# Altium PCB PWM.PcbDoc
Units mil, origin at the board's own origin, x right, y up, seen from the top; angles counter-clockwise.
Board outline 1915.02 x 2010.03 mil, 2 copper layers (Top Layer, Bottom Layer); 17 components, 18 nets, 53 pads, 0 vias.
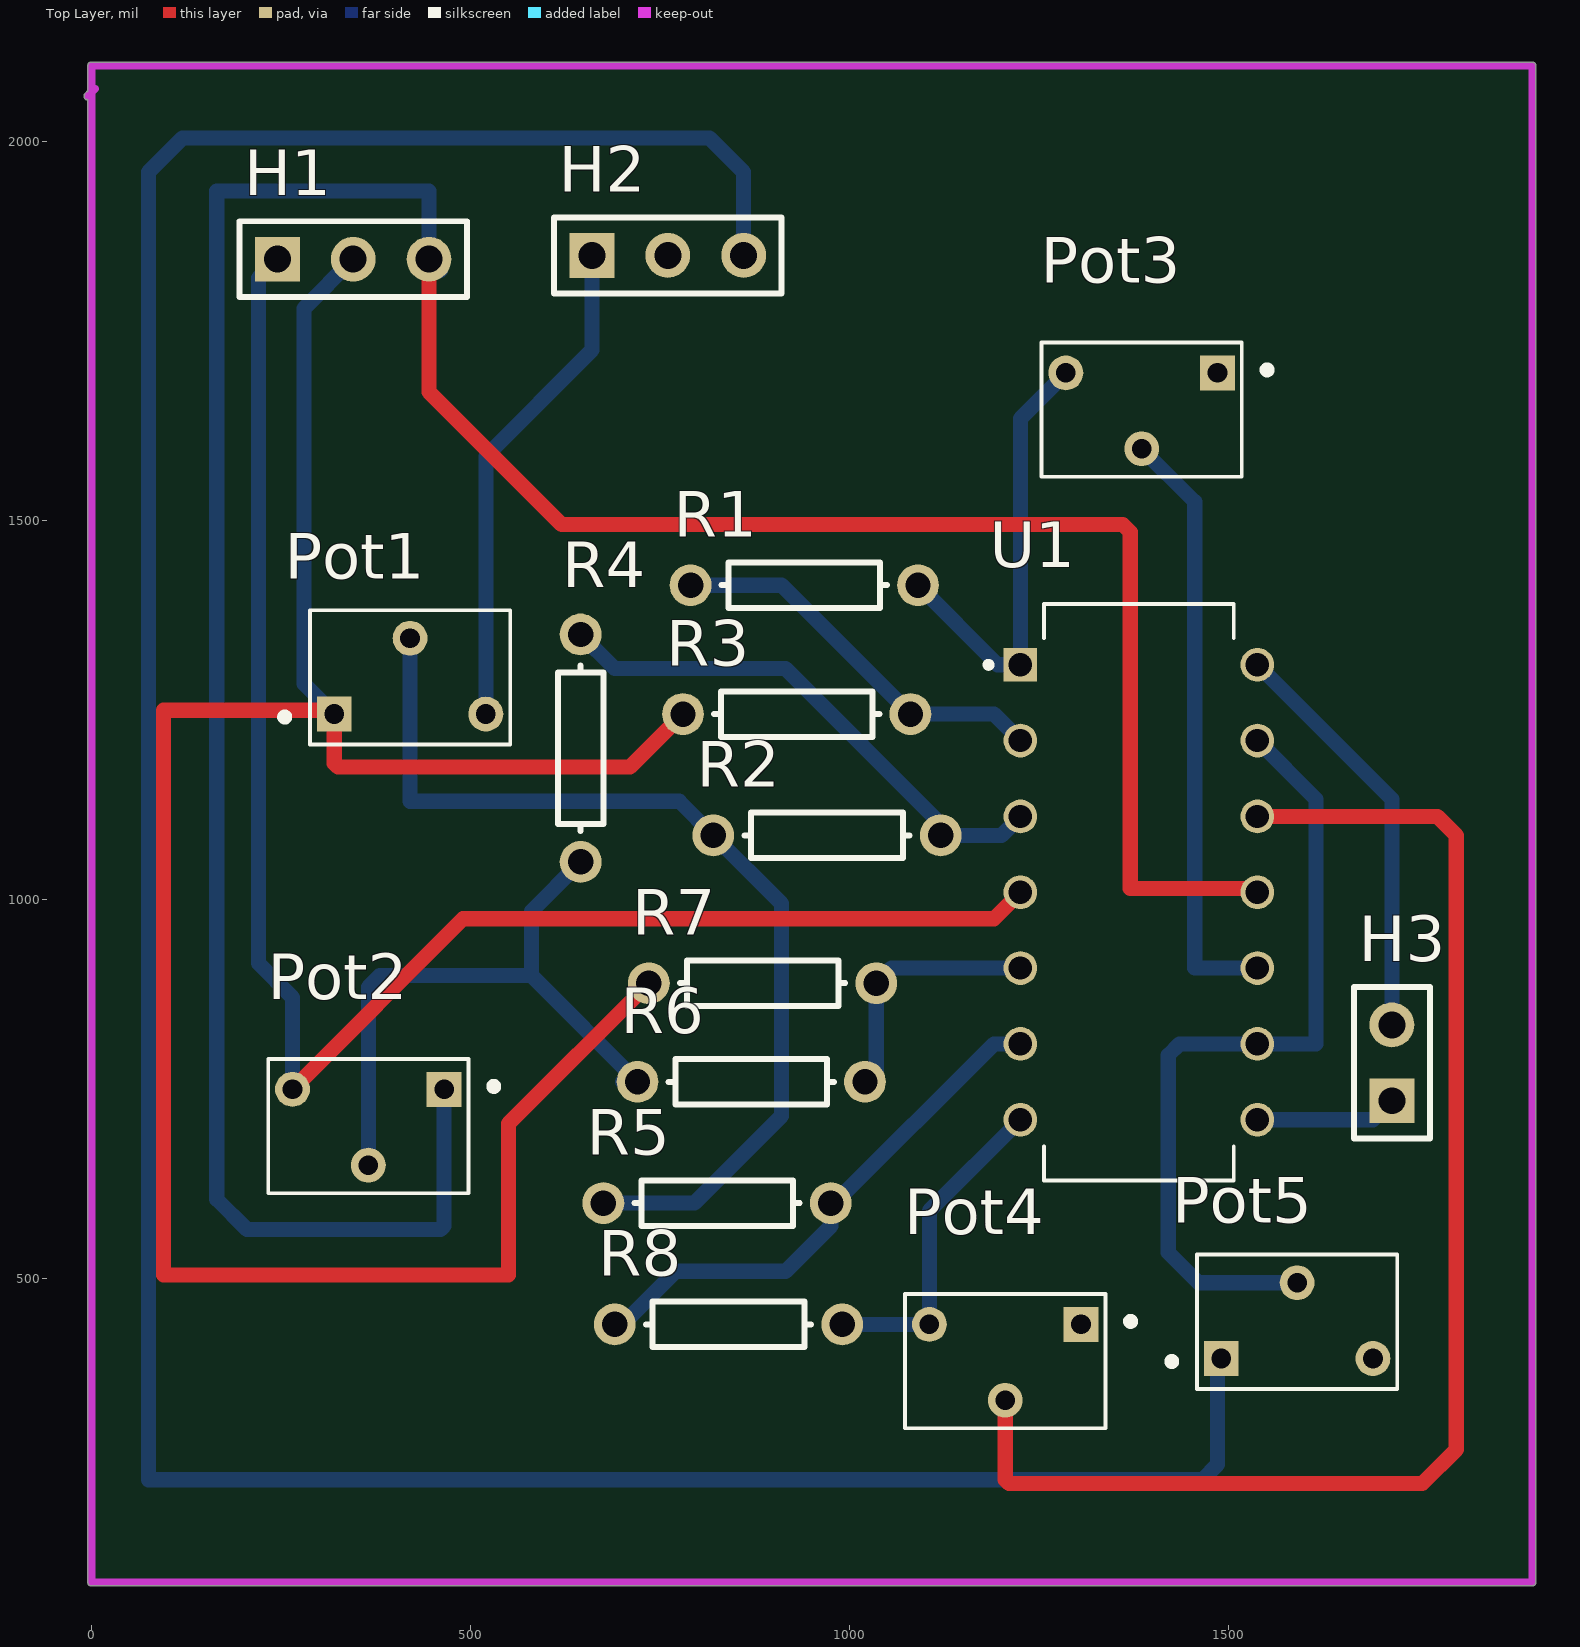
[diagram p0: Top Layer view]
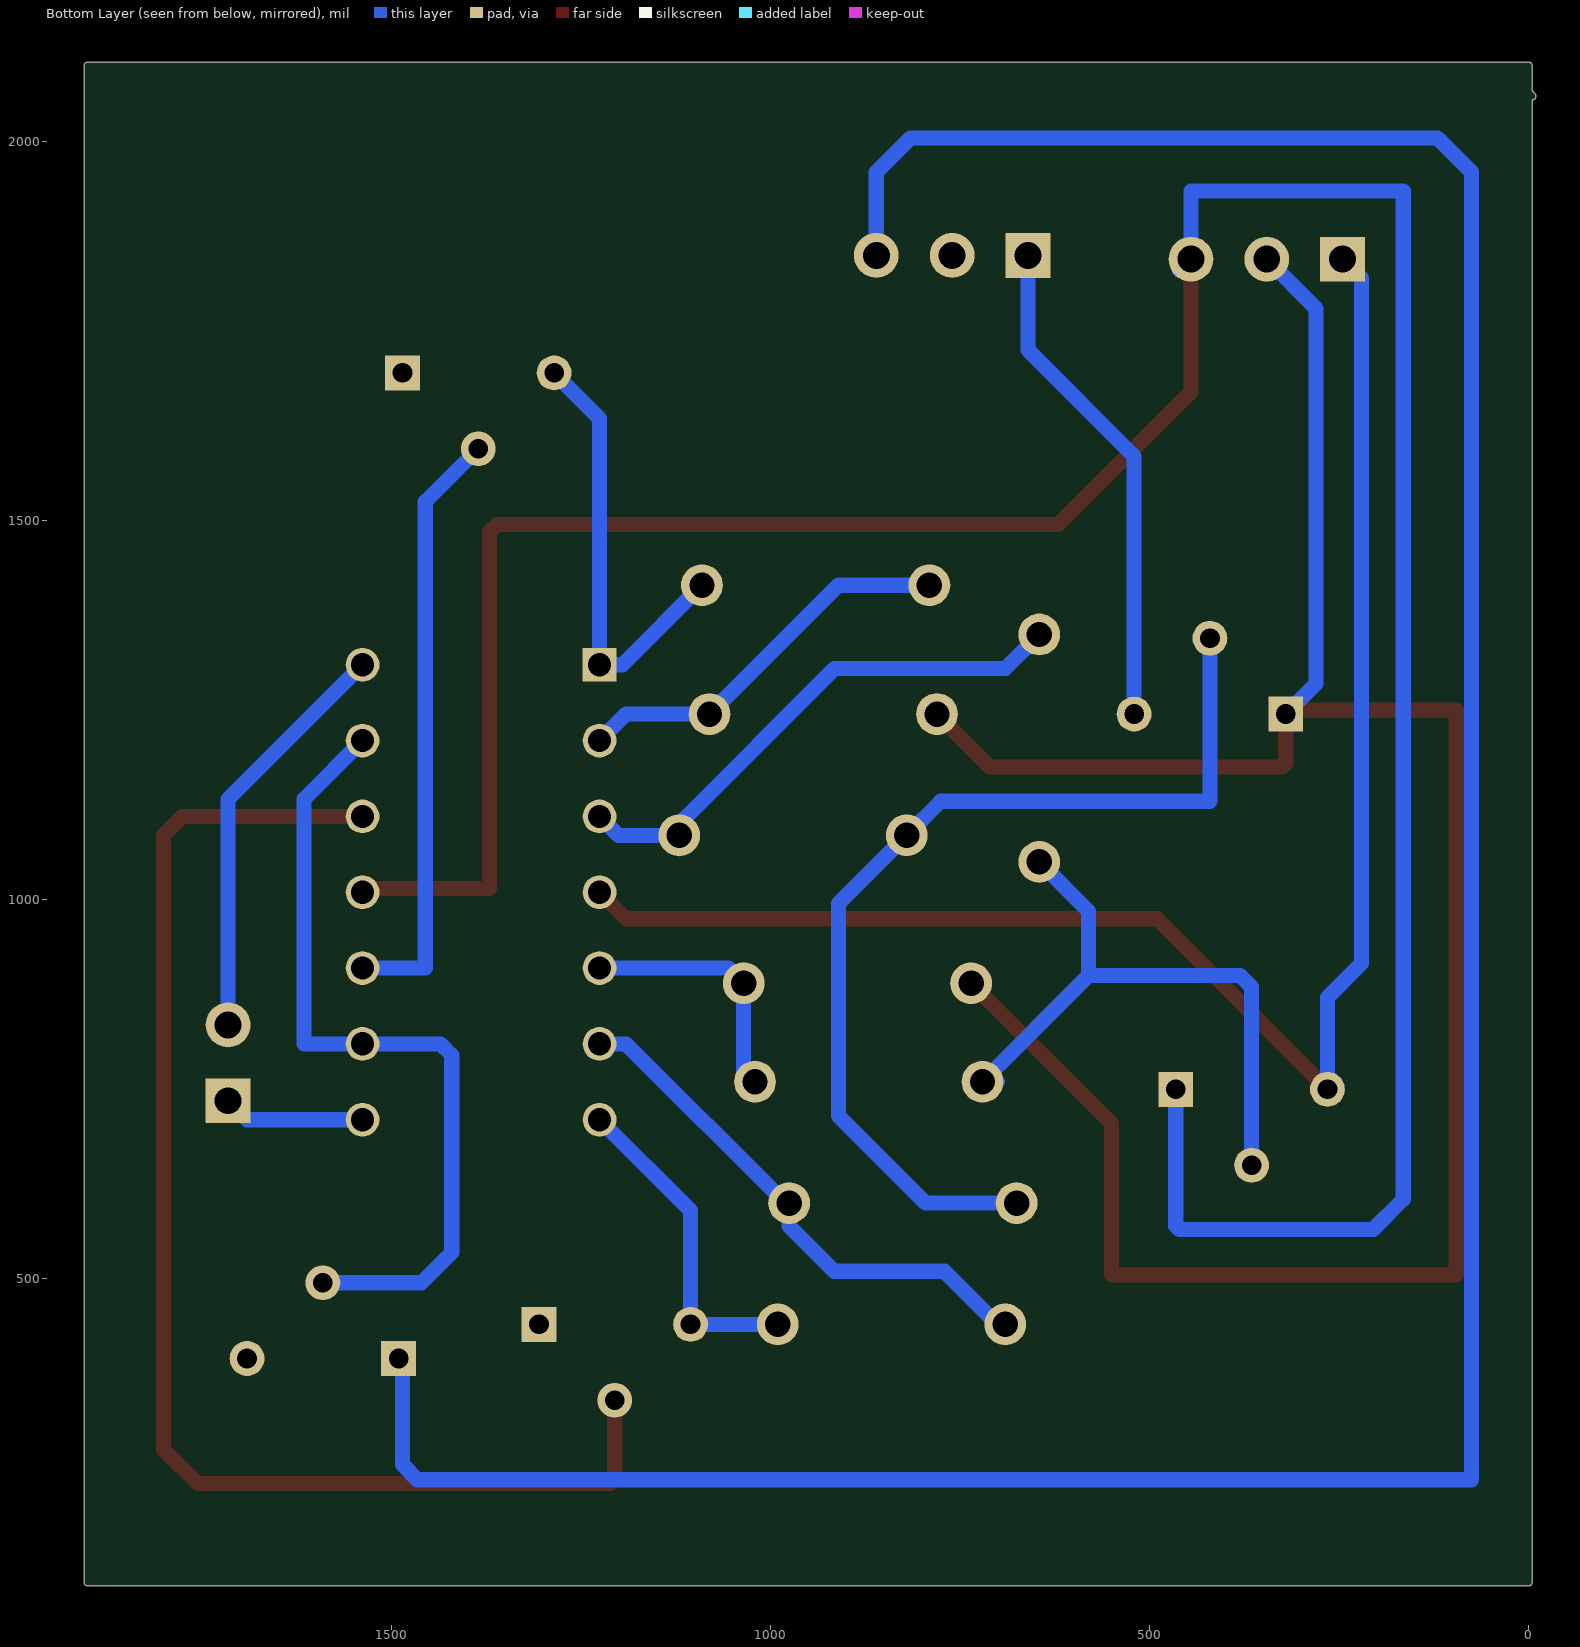
[diagram p1: Bottom Layer view, seen from below]

## Layer stack, top to bottom
Top Solder: solder mask 0.4, Solder Resist, Dk 3.5
Top Layer: signal copper 1.4
Dielectric 1: dielectric 12.6, FR-4, Dk 4.8
Bottom Layer: signal copper 1.4
Bottom Solder: solder mask 0.4, Solder Resist, Dk 3.5

## Board outline
-5.01,100 -5.01,2054.99 cw(c-5,2060) -8.55,2063.55 -5.01,2067.08 -5.01,2100 cw(c0,2100) 0,2105.01 1900,2105.01 cw(c1900,2100) 1905.01,2100 1905.01,100 cw(c1900,100) 1900,94.98 0,94.98 cw(c0,100)

## Design rules (kind name [scope] priority, off if disabled: settings)
Clearance Clearance_1 [All] p1: gap=10 ignorepadtopadclearanceinfootprint=FALSE except(0: Arc-Hole Track-Hole SMDPad-Hole THPad-Hole Via-Hole Fill-Hole Poly-Hole Region-Hole Text-Hole)
Clearance [All] p2: gap=10 ignorepadtopadclearanceinfootprint=FALSE except(0: Arc-Hole Track-Hole SMDPad-Hole THPad-Hole Via-Hole Fill-Hole Poly-Hole Region-Hole Text-Hole)
PolygonConnect [All] p1: connectstyle=Relief reliefconductorwidth=10 reliefentries=4 polygonreliefangle="90 Angle" airgapwidth=10
RoutingVias [All] p1: holewidth=28 width=50 viastyle="Through Hole" minholewidth=28 minwidth=50 maxholewidth=28 maxwidth=50
SolderMaskExpansion [All] p1: expansion=4 istentingtop=FALSE
Width [All] p1: maxlimit=40 minlimit=10 preferedwidth=20
30 further rules are at their usual default settings.

## Components (designator, comment, footprint, x,y, rotation, side; value= is the part's Value field where it differs from the comment)
H1 "Header 3" HDR1X3 245,1845 r0 top
H2 "Header 3" HDR1X3 660,1850 r0 top
H3 "Header 2" HDR1X2 1715,735 r90 top
Pot1 "3266W-1-103" TRIM_3266W-1-103 420,1245 r0 top
Pot2 "3266W-1-103" TRIM_3266W-1-103 365,750 r180 top
Pot3 "3266W-1-103" TRIM_3266W-1-103 1385,1695 r180 top
Pot4 "3266W-1-103" TRIM_3266W-1-103 1205,440 r180 top
Pot5 "3266W-1-103" TRIM_3266W-1-103 1590,395 r0 top
R1 "10K" AXIAL-0.3 940,1415 r0 top
R2 "10K" AXIAL-0.3 970,1085 r180 top
R3 "Res1" AXIAL-0.3 930,1245 r0 top value=1K
R4 "10K" AXIAL-0.3 645,1200 r270 top
R5 "10K" AXIAL-0.3 825,600 r180 top
R6 "10K" AXIAL-0.3 870,760 r180 top
R7 "10K" AXIAL-0.3 885,890 r0 top
R8 "10K" AXIAL-0.3 840,440 r0 top
U1 "LM324NE3" DIP794W45P254L1969H508Q14 1381.3,1010 r0 top

## Footprints (in the part's own frame and the unit in brackets; to place one, negate y for a bottom-side part, rotate by r counter-clockwise, add the part's x,y. Pads: shape width x height; smd on the part's side, far side on the other; paste and mask are expansions set on the pad)
AXIAL-0.3 [mm] "Axial Device, Thru-Hole; 2 Leads; 0.3 in Pin Spacing"
  round 1.4 hole 0.85: 1(-3.81,0) 2(3.81,0)
  silkscreen extent -2.77,-0.76 2.77,0.76
DIP794W45P254L1969H508Q14 [mm]
  rect 1.13x1.13 / inner round 1.13 / far side rect 1.13x1.13 hole 0.78: 1(-3.97,7.62)
  round 1.13 hole 0.78: 2(-3.97,5.08) 3(-3.97,2.54) 4(-3.97,0) 5(-3.97,-2.54) 6(-3.97,-5.08) 7(-3.97,-7.62) 8(3.97,-7.62) 9(3.97,-5.08) 10(3.97,-2.54) 11(3.97,0) 12(3.97,2.54) 13(3.97,5.08) 14(3.97,7.62)
  silkscreen extent -5.13,-9.65 3.17,9.65, body extent -4.1,-9.65 4.1,9.65, height 5.08
HDR1X2 [mm] "Connector; Header; 2 Position"
  rect 1.5x1.5 hole 0.9: 1(0,0)
  round 1.5 hole 0.9: 2(2.54,0)
  silkscreen extent -1.27,-1.27 3.81,1.27
HDR1X3 [mm] "Connector; Header; 3 Position"
  rect 1.5x1.5 hole 0.9: 1(0,0)
  round 1.5 hole 0.9: 2(2.54,0) 3(5.08,0)
  silkscreen extent -1.27,-1.27 6.35,1.27
TRIM_3266W-1-103 [mm]
  rect 1.168x1.168 hole 0.66: 1(-2.54,0)
  round 1.168 hole 0.66: 2(0,2.54) 3(2.54,0)
  silkscreen extent -4.3,-1.02 3.35,3.48, body extent -3.35,-2.25 3.35,2.25, height 4.64

## Part data
H1 H2: "Header, 3-Pin", LatestRevisionDate=17-Jul-2002, LatestRevisionNote="Re-released for DXP Platform.", Publisher="Altium Limited"
H3: "Header, 2-Pin", LatestRevisionDate=17-Jul-2002, LatestRevisionNote="Re-released for DXP Platform.", Publisher="Altium Limited"
Pot1 Pot2 Pot3 Pot4 Pot5: "10 kOhms 0.25W, 1/4W PC Pins Through Hole Trimmer Potentiometer Cermet 12 Turn Top Adjustment", Package="TO-218 Bourns", Availability=Warning, Check_prices=https://www.snapeda.com/parts/3266W-1-103/Bourns/view-part/512920/?ref=eda, MF=Bourns, MP=3266W-1-103, Price=None, Purchase-URL=https://pricing.snapeda.com/search/part/3266W-1-103/?ref=eda, SnapEDA_Link=https://www.snapeda.com/parts/3266W-1-103/Bourns/view-part/512920/?ref=snap
R1: library part Res1, LatestRevisionDate=17-Jul-2002, LatestRevisionNote="Re-released for DXP Platform.", PackageDescription="Axial Device, Thru-Hole; 2 Leads; 0.3 in Pin Spacing", PackageReference=AXIAL-0.3, Published=8-Jun-2000, Publisher="Altium Limited"
R2 R4 R5 R6 R7 R8: library part Res1, "Resistor", LatestRevisionDate=17-Jul-2002, LatestRevisionNote="Re-released for DXP Platform.", PackageDescription="Axial Device, Thru-Hole; 2 Leads; 0.3 in Pin Spacing", PackageReference=AXIAL-0.3, Published=8-Jun-2000, Publisher="Altium Limited"
R3: "Resistor", LatestRevisionDate=17-Jul-2002, LatestRevisionNote="Re-released for DXP Platform.", PackageDescription="Axial Device, Thru-Hole; 2 Leads; 0.3 in Pin Spacing", PackageReference=AXIAL-0.3, Published=8-Jun-2000, Publisher="Altium Limited"
U1: "Quad, 30-V, 1.2-MHz operational amplifier", Package="PDIP-14 Texas Instruments", Availability="In Stock", Check_prices=https://www.snapeda.com/parts/LM324NE3/Texas+Instruments/view-part/?ref=eda, MF="Texas Instruments", MP=LM324NE3, Price=None, Purchase-URL=https://pricing.snapeda.com/search/part/LM324NE3/?ref=eda, SnapEDA_Link=https://www.snapeda.com/parts/LM324NE3/Texas+Instruments/view-part/?ref=snap

## Nets (pads, with @x,y where several pads share a name; then routed paths per layer and width w, separated by ;. In a path a pad name is that pad's centre, name@x,y a point inside that pad or via, vN(x,y) a via of type N, cw(c..) or ccw(c..) an arc to the next point about the centre after c; other vN are vias at no path point)
GND: H1.3 Pot2.1 U1.11 | length 4043.2
  Top Layer w20: H1.3 445,1670 620,1495 1360,1495 1370,1485 1370,1015 1532.6,1015 U1.11
  Bottom Layer w20: H1.3@460,1830 H1.3 445,1935 165,1935 165,605 205,565 460,565 465,570 Pot2.1 ; U1.11 U1.11@1542.6,1005
MID: H1.2 Pot1.1 R3.1 R7.1 | length 3088.3
  Top Layer w20: R7.1 550,705 550,505 95,505 95,1250 315,1250 Pot1.1 320,1180 325,1175 710,1175 R3.1
  Bottom Layer w20: Pot1.1 280,1285 280,1780 H1.2
NetH3_1: H3.1 U1.8 | length 187.8
  Bottom Layer w20: U1.8 1690,710 H3.1
NetH3_2: H3.2 U1.14 | length 548.5
  Bottom Layer w20: U1.14 1715,1132.6 H3.2
NetPot1_2: Pot1.2 R2.2 R5.2 | length 1323.6
  Bottom Layer w20: Pot1.2 420,1130 775,1130 R2.2 910,995 910,715 795,600 R5.2
NetPot2_2: Pot2.2 R4.2 R6.2 | length 858.2
  Bottom Layer w20: Pot2.2@370,655 Pot2.2 365,885 380,900 580,900 ; R4.2 580,985 580,900 ; R6.2@700,760 R6.2 580,900
NetPot3_2: Pot3.2 U1.10 | length 796.6
  Bottom Layer w20: Pot3.2 1455,1525 1455,910 U1.10
NetPot3_3: Pot3.3 R1.2 U1.1 | length 588.3
  Bottom Layer w20: R1.2 1195,1310 U1.1 1225,1480 1225,1635 Pot3.3
NetPot4_2: Pot4.2 U1.12 | length 1803.5
  Top Layer w20: Pot4.2 1205,235 1210,230 1755,230 1800,275 1800,1085 1775,1110 U1.12
NetPot4_3: Pot4.3 R8.2 U1.7 | length 434.7
  Bottom Layer w20: R8.2 Pot4.3 1105,590 U1.7
NetPot5_2: Pot5.2 U1.9 U1.13 | length 1079.8
  Bottom Layer w20: U1.13 1615,1132.6 1615,810 U1.9 1435,810 1420,795 1420,535 1460,495 Pot5.2
NetR1_1: R1.1 R3.2 U1.2 | length 519.9
  Bottom Layer w20: R1.1 910,1415 R3.2 1190,1245 U1.2
NetR2_1: R2.1 R4.1 U1.3 | length 708.9
  Bottom Layer w20: R4.1 690,1305 915,1305 1120,1100 R2.1 1200,1085 U1.3
NetR5_1: R5.1 R8.1 U1.6 | length 705.8
  Bottom Layer w20: R8.1 700,440 770,510 915,510 975,570 R5.1 980,600 1190,810 U1.6
NetR6_1: R6.1 R7.2 U1.5 | length 334.5
  Bottom Layer w20: R6.1 1035,775 R7.2 1055,910 U1.5
PID: H2.1 Pot1.3 | length 663
  Bottom Layer w20: Pot1.3 520,1585 660,1725 H2.1
TRI: H2.3 Pot5.1 | length 4217.6
  Bottom Layer w20: H2.3 860,1960 815,2005 120,2005 75,1960 75,235 1465,235 1485,255 1485,390 Pot5.1
VCC: H1.1 Pot2.3 U1.4 | length 2191.7
  Top Layer w20: Pot2.3 490,975 1190,975 U1.4
  Bottom Layer w20: H1.1 220,1820 220,916.33 265,871.33 Pot2.3
pads on no net: H2.2 Pot3.1 Pot4.1 Pot5.3

## Keep-outs
Top Layer:
  lines w10: -5,2060 5,2070 ; 0,100 1900,100 1900,2100 0,2100 0,100